# Altium PCB DA1.PcbDoc
Units mm, origin at the board's own origin, x right, y up, seen from the top; angles counter-clockwise.
Board outline 95.89 x 64.26 mm, 2 copper layers (Top Layer, Bottom Layer); 64 components, 73 nets, 258 pads, 30 vias.
Unrouted connection lines stored in the file: 1.
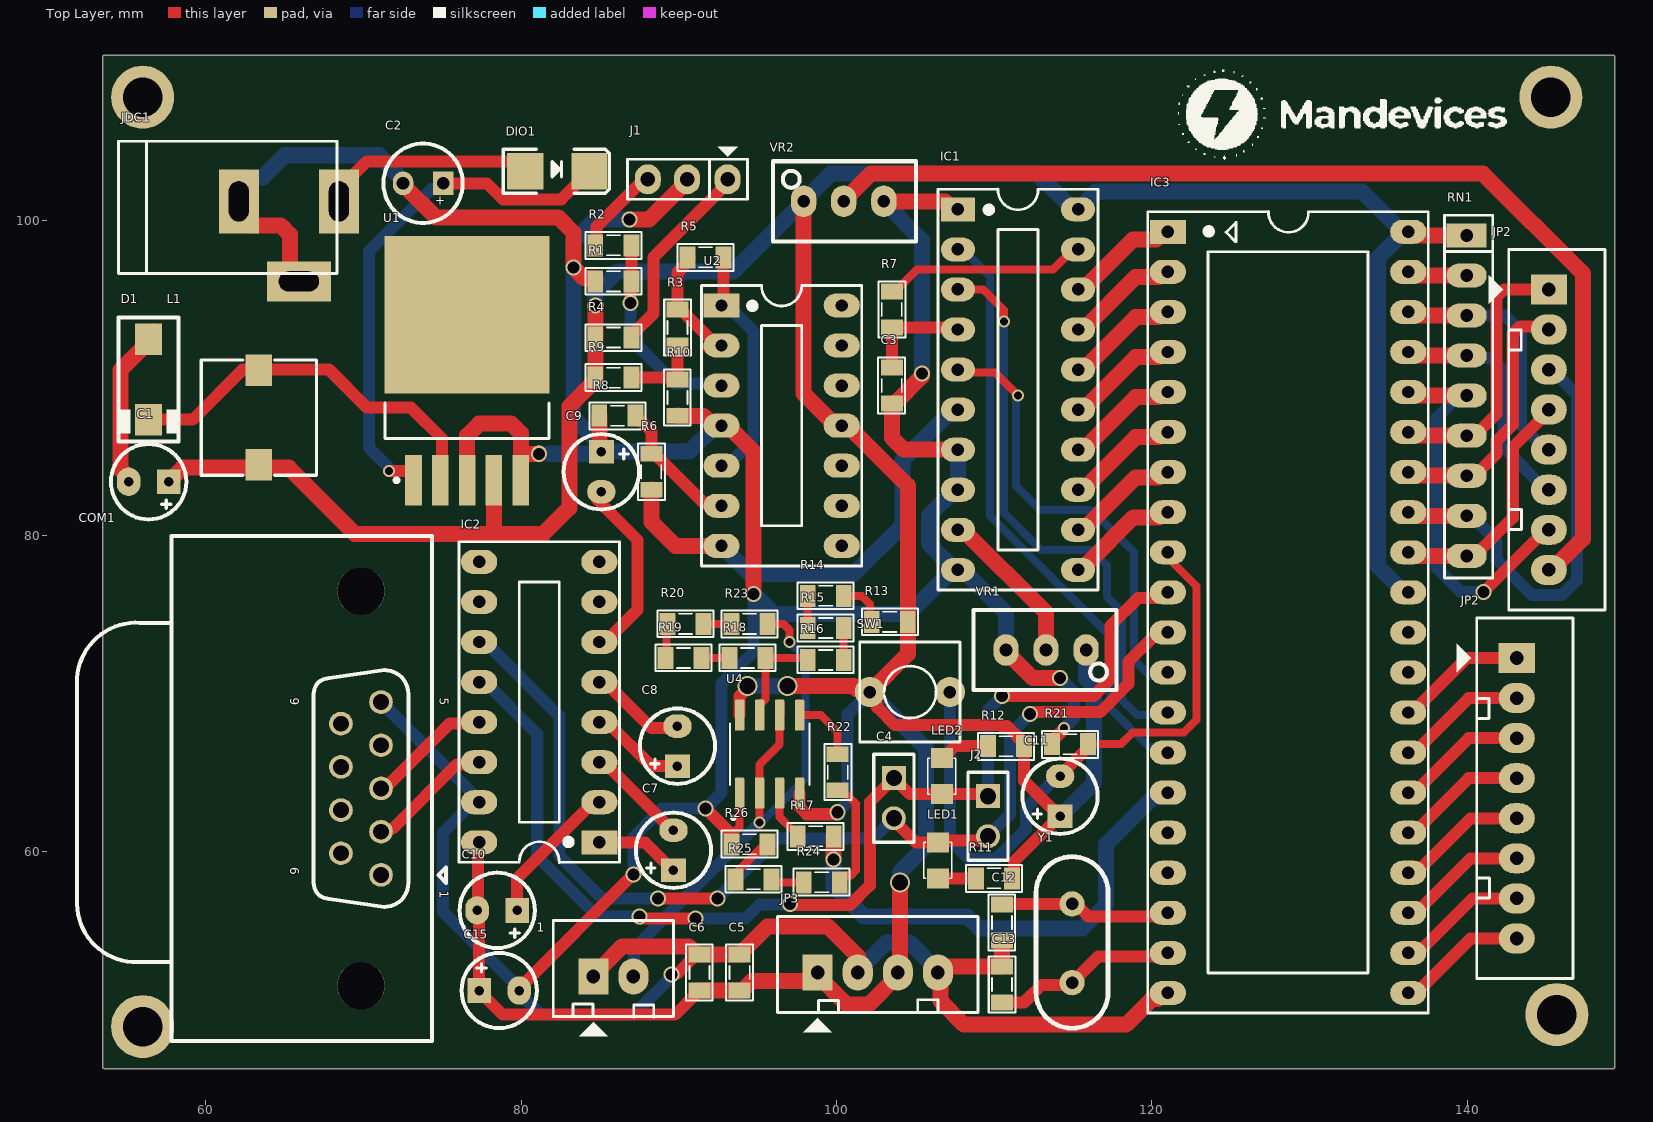
[diagram p0: Top Layer view]
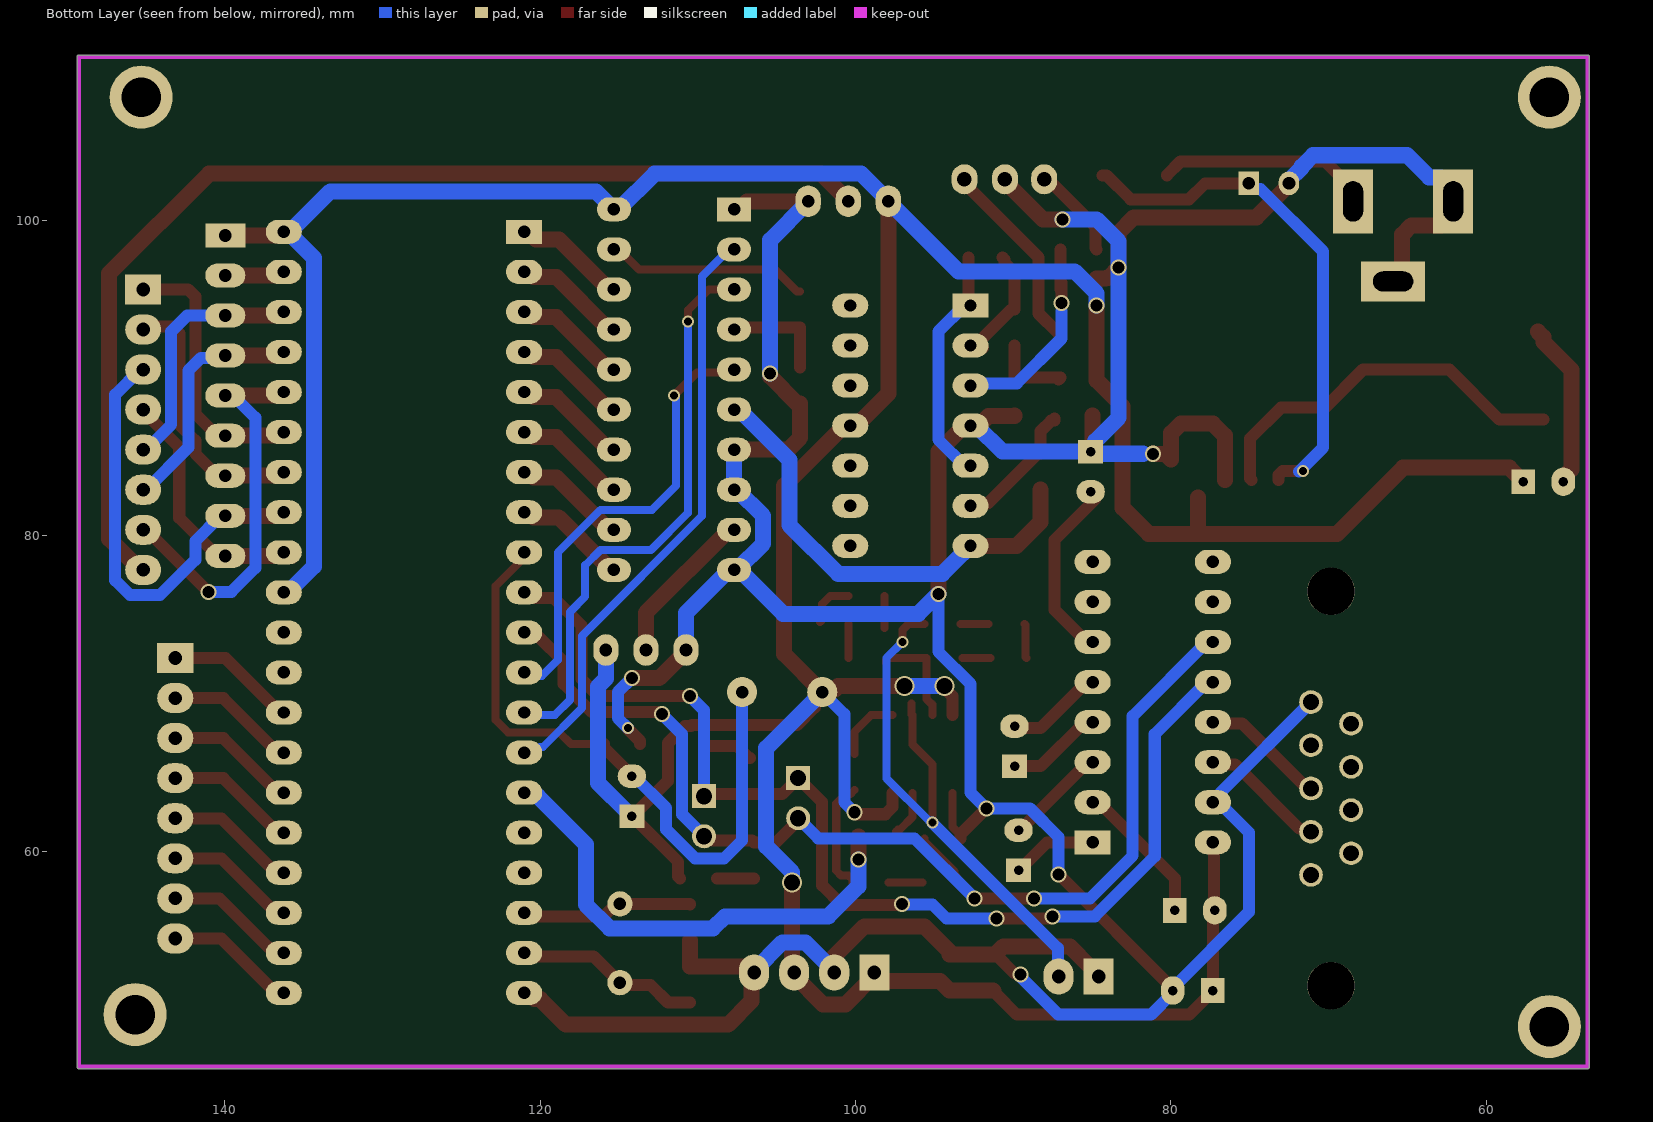
[diagram p1: Bottom Layer view, seen from below]
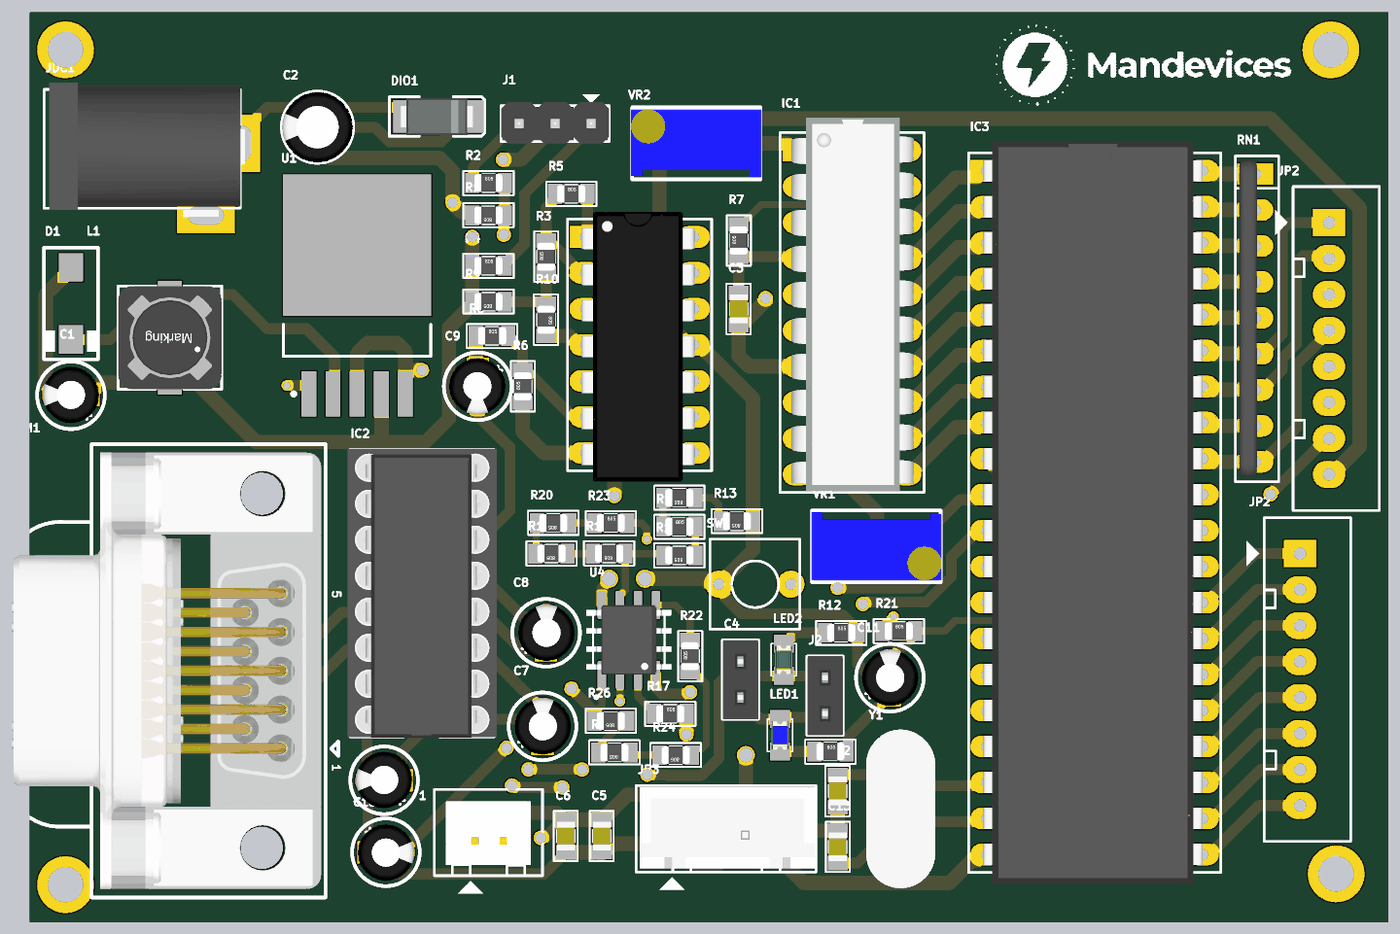
[diagram p2: 3D render of the assembled board from above, using the file's embedded part models]

## Layer stack, top to bottom
Top Solder: solder mask 0.0102, Solder Resist, Dk 3.5
Top Layer: signal copper 0.0356
Dielectric 1: dielectric 0.32, FR-4, Dk 4.8
Bottom Layer: signal copper 0.0356
Bottom Solder: solder mask 0.0102, Solder Resist, Dk 3.5

## Board outline
53.484,46.418 cw(c53.594,46.482) 53.467,46.482 53.467,110.363 cw(c53.594,110.363) 53.594,110.49 149.225,110.49 cw(c149.225,110.363) 149.352,110.363 cw(c149.225,110.363) 149.335,110.299 cw(c149.225,110.236) 149.352,110.236 149.352,46.355 cw(c149.225,46.355) 149.225,46.228 53.594,46.228 cw(c53.594,46.355)

## Design rules (kind name [scope] priority, off if disabled: settings)
Clearance [All] p1: gap=0.254 ignorepadtopadclearanceinfootprint=FALSE except(0: Arc-Hole Track-Hole SMDPad-Hole THPad-Hole Via-Hole Fill-Hole Poly-Hole Region-Hole Text-Hole)
PolygonConnect [All] p1: connectstyle=Relief reliefconductorwidth=0.254 reliefentries=4 polygonreliefangle="90 Angle" airgapwidth=0.254
RoutingVias [All] p1: holewidth=0.762 width=1.016 viastyle="Through Hole" minholewidth=0.508 minwidth=0.762 maxholewidth=1.016 maxwidth=1.27
SolderMaskExpansion [All] p1: expansion=0.102 istentingtop=FALSE
Width [All] p1: maxlimit=1.016 minlimit=0.508 preferedwidth=0.762
30 further rules are at their usual default settings.

## Components (designator, comment, footprint, x,y, rotation, side; value= is the part's Value field where it differs from the comment)
1 "HS1101" CON2 84.582,52.07 r0 top value="Connector 2"
C1 "220uF" C3MM 56.388,83.439 r180 top
C2 "680uF" C5mm 73.787,102.362 r180 top
C3 "150pF" CAP_0805 103.505,89.535 r270 top
C4 "JP2" JP2-C1T 103.632,64.643 r270 top
C5 "104" CAP_0805 93.853,52.324 r270 top value=33p
C6 "104" CAP_0805 91.313,52.324 r270 top value=33p
C7 "10uF/16V" C3MM 89.662,60.071 r90 top
C8 "10uF/16V" C3MM 89.916,66.675 r90 top
C9 "10uF/16V" C3MM 85.09,84.074 r270 top
C10 "10uF/16V" C3MM 78.486,56.261 r180 top
C11 "10uF" C3MM 114.173,63.5 r90 top
C12 "33p" CAP_0805 110.49,55.499 r270 top
C13 "33p" CAP_0805 110.49,51.562 r90 top
C15 "0.1uF" C3MM 78.613,51.181 r0 top
COM1 "COM 9 FMALE" COM9B 69.85,63.992 r270 top value="COM 9"
D1 "1N5822" SMA 56.388,89.92 r270 top value="Diode c?m 1N5408"
DIO1 "Diode SMD" DIO-SMD-106 82.296,103.124 r180 top value=1N5007
IC1 "ADC0804LCN" DIP20/W0.3 107.696,100.711 r270 top
IC2 "MAX232" DIP16/W0.3 84.963,60.579 r90 top
IC3 "AT89C52" DIP40/W0.6 121.007,99.288 r270 top
J1 "Jumper 3" JP3 90.551,102.616 r180 top value=J3
J2 "JP2" JP2-C1T 109.601,63.5 r270 top
JDC1 "Jac DC" DC-IN 65.278,98.679 r0 top
JP2 "" CON8 143.129,72.263 r270 top value="Connector 8"
JP2 "JP8" CON8 145.161,95.631 r270 top value="Connector 8"
JP3 "JP4" CON4 98.806,52.324 r0 top value="Connector 4"
L1 "33uH" L-SMD-M-7.3x4.5 63.373,87.503 r0 top value="150 mH"
LED1 "LED" LED-0805-Blue 106.426,58.293 r90 top value="LED 3 ly Single Colour"
LED2 "LED" LED-0805-Green 106.68,65.913 r270 top value="LED 3 ly Single Colour"
R1 "50k" RES-SMD-0805 85.852,96.139 r180 top
R2 "50k" RES-SMD-0805 85.852,98.425 r0 top
R3 "50k" RES-SMD-0805 89.916,93.218 r90 top
R4 "100" RES-SMD-0805 85.852,92.583 r0 top
R5 "50k" RES-SMD-0805 91.694,97.663 r0 top
R6 "7.5k" RES-SMD-0805 88.265,84.074 r90 top
R7 "10k" RES-SMD-0805 103.505,94.361 r90 top
R8 "1k" RES-SMD-0805 86.106,87.63 r0 top
R9 "100" RES-SMD-0805 85.852,90.043 r180 top
R10 "100" RES-SMD-0805 89.916,88.773 r270 top
R11 "390" RES-SMD-0805 109.982,58.293 r0 top
R12 "390" RES-SMD-0805 110.744,66.675 r0 top
R13 "24k" RES-SMD-0805 103.378,74.549 r180 top
R14 "10k" RES-SMD-0805 99.314,76.2 r180 top
R15 "6.8k" RES-SMD-0805 99.314,74.168 r0 top
R16 "9.1k" RES-SMD-0805 99.314,72.136 r180 top
R17 "1k" RES-SMD-0805 98.679,60.96 r0 top
R18 "270k" RES-SMD-0805 94.361,72.263 r180 top
R19 "270k" RES-SMD-0805 90.297,72.263 r180 top
R20 "36k" RES-SMD-0805 90.424,74.422 r180 top
R21 "10k" RES-SMD-0805 114.808,66.802 r0 top
R22 "360k" RES-SMD-0805 100.076,65.024 r90 top
R23 "20k" RES-SMD-0805 94.488,74.422 r0 top
R24 "360k" RES-SMD-0805 99.06,58.039 r180 top
R25 "150k" RES-SMD-0805 94.739,58.225 r180 top
R26 "39k" RES-SMD-0805 94.488,60.452 r180 top
RN1 "10K" RN8 139.954,99.06 r270 top value="Tro thanh 10K"
SW1 "SW" SW2 107.188,70.104 r180 top value="SW chip 2 pin"
U1 "LM2976" TO-263 76.581,89.535 r90 top
U2 "LF347" DIP14/W0.3 92.71,94.615 r270 top
U4 "TLC555IDR" SOIC127P599X175-8N 95.758,66.167 r90 top
VR1 "10k" VAR_RESISTOR 113.284,72.771 r180 top value="VR 10K"
VR2 "10K" VAR_RESISTOR 100.457,101.219 r0 top value="VR 10K"
Y1 "12Mhz" XTAL 114.935,54.229 r90 top

## Footprints (in the part's own frame and the unit in brackets; to place one, negate y for a bottom-side part, rotate by r counter-clockwise, add the part's x,y. Pads: shape width x height; smd on the part's side, far side on the other; paste and mask are expansions set on the pad)
C3MM [mm]
  rect 1.5x1.58 hole 0.6: 1(-1.27,0)
  oval 1.5x1.8 hole 0.6: 2(1.27,0)
  silkscreen extent -2.39,-2.39 2.39,2.39, body extent -2,-2.03 1.99,1.97, height 7.01
C5mm [mm]
  rect 1.3x1.5 hole 0.8: 1(-1.27,0)
  oval 1.3x1.5 hole 0.8: 2(1.27,0)
  silkscreen extent -2.51,-2.51 2.51,2.51, body extent -2.5,-2.5 2.49,2.5, height 11.01
CAP_0805 [mil]
  rect 39.37x55 smd: 1(-45,0) 2(45,0)
  silkscreen extent -70,-34 70,33, body extent -40,-25 40,25, height 24
COM9B [mm] "D-SUB- 9P, FEMALE, RT ANGLE, TH"
  round 1.5 hole 1 unplated: 1(5.48,1.27) 2(2.74,1.27) 3(0,1.27) 4(-2.74,1.27) 5(-5.48,1.27) 6(4.11,-1.27) 7(1.37,-1.27) 8(-1.37,-1.27) 9(-4.11,-1.27)
  round 3 hole 3 unplated: 10(-12.5,0) 11(12.5,0)
  silkscreen extent -16,-18.01 16,5.4, body extent -15.4,-17.65 15.4,4.2, height 13.2
CON2 [mil] "CON2"
  rect 75x90 hole 34: 1(0,0)
  oval 75x90 hole 34: 2(100,0)
  silkscreen extent -100,-150 200,140, body extent -68,-70 168,107, height 236
CON4 [mil] "CON4"
  rect 75x90 hole 34: 1(0,0)
  oval 75x90 hole 34: 2(100,0) 3(200,0) 4(300,0)
  silkscreen extent -100,-150 400,140, body extent -90,-90 398,136, height 276
CON8 [mil] "CON8"
  rect 75x90 hole 34: 1(0,0)
  oval 75x90 hole 34: 2(100,0) 3(200,0) 4(300,0) 5(400,0) 6(500,0) 7(600,0) 8(700,0)
  silkscreen extent -100,-150 800,140
DC-IN [mil] "Jac DC input"
  rect 100x160 hole 50 slot 100 at 90 deg: 1(125,100) 2(-125,100)
  rect 160x100 hole 50 slot 100 at 0 deg: 3(25,-100)
  silkscreen extent -425,-80 120,250, body extent -410,-105 134,269, height 434
DIO-SMD-106 [mil]
  rect 90x90.55 smd: 1(80,0) 2(-80,0)
  silkscreen extent -130,-55 135,55, body extent -99,-50 106,52, height 95
DIP14/W0.3 [mil] "14PIN, W 300mil, Pin to pin 100mil"
  rect 60x90 hole 31: 1(0,0)
  oval 60x90 hole 31: 2(100,0) 3(200,0) 4(300,0) 5(400,0) 6(500,0) 7(600,0) 8(600,300) 9(500,300) 10(400,300) 11(300,300) 12(200,300) 13(100,300) 14(0,300)
  silkscreen extent -50,-50 650,350, body extent -70,-12 680,302, height 145
DIP16/W0.3 [mil] "16 PIN, W 300mil, Pin to pin 100mil"
  rect 60x90 hole 31: 1(0,0)
  oval 60x90 hole 31: 2(100,0) 3(200,0) 4(300,0) 5(400,0) 6(500,0) 7(600,0) 8(700,0) 9(700,300) 10(600,300) 11(500,300) 12(400,300) 13(300,300) 14(200,300) 15(100,300) 16(0,300)
  silkscreen extent -50,-50 750,350, body extent -52,-57 752,356, height 299
DIP20/W0.3 [mil] "DIP 20, 20 PIN, W 300mil, Pin to pin 100mil"
  rect 60x85 hole 31: 1(0,0)
  oval 60x85 hole 31: 2(100,0) 3(200,0) 4(300,0) 5(400,0) 6(500,0) 7(600,0) 8(700,0) 9(800,0) 10(900,0) 11(900,300) 12(800,300) 13(700,300) 14(600,300) 15(500,300) 16(400,300) 17(300,300) 18(200,300) 19(100,300) 20(0,300)
  silkscreen extent -50,-50 950,350, body extent -91,-18 945,322, height 155
DIP40/W0.6 [mil] "40 PIN, W 600mil, Pin to pin 100mil"
  rect 60x90 hole 31: 1(0,0)
  oval 60x90 hole 31: 2(100,0) 3(200,0) 4(300,0) 5(400,0) 6(500,0) 7(600,0) 8(700,0) 9(800,0) 10(900,0) 11(1000,0) 12(1100,0) 13(1200,0) 14(1300,0) 15(1400,0) 16(1500,0) 17(1600,0) 18(1700,0) 19(1800,0) 20(1900,0) 21(1900,600) 22(1800,600) 23(1700,600) 24(1600,600) 25(1500,600) 26(1400,600) 27(1300,600) 28(1200,600) 29(1100,600) 30(1000,600) 31(900,600) 32(800,600) 33(700,600) 34(600,600) 35(500,600) 36(400,600) 37(300,600) 38(200,600) 39(100,600) 40(0,600)
  silkscreen extent -50,-50 1950,650, body extent -82,-10 1982,600, height 224
JP2-C1T [mm] "2 row, straight, gold plating"
  rect 1.52x1.52 hole 1.02: 1(0,0)
  round 1.52 hole 1.02: 2(2.54,0)
  silkscreen extent -1.52,-1.27 4.06,1.27, body extent -1.52,-1.25 4.06,1.25, height 8.51
JP3 [mil] "Jumper 3"
  oval 65x75 hole 36: 1(-100,0) 2(1,0) 3(99,0)
  silkscreen extent -150,-81 150,50, body extent -150,-60 150,55, height 355
L-SMD-M-7.3x4.5 [mm] "WE-PDA SMD Shielded Power Inductor, 7345"
  rect 1.7x2 smd: 1(0,3) 2(0,-3)
  silkscreen extent -3.65,-3.65 3.65,3.65, body extent -3.65,-3.65 3.65,3.65, height 4.05
LED-0805-Blue [mil]
  rect 50x55 smd: 1(0,0) 2(90,0)
  silkscreen extent 0,-35 90,35, body extent 5,-25 85,25, height 43
LED-0805-Green [mil]
  rect 50x55 smd: 1(0,0) 2(90,0)
  silkscreen extent 0,-35 90,35, body extent 5,-25 85,25, height 43
RES-SMD-0805 [mil]
  rect 39.37x55 smd: 1(-45,0) 2(45,0)
  silkscreen extent -70,-34 70,33, body extent -39,-25 39,25, height 31
RN8 [mil] "R SIP8, 9 Pin"
  rect 60x100 hole 32: 1(0,0)
  oval 60x100 hole 32: 2(100,0) 3(200,0) 4(300,0) 5(400,0) 6(500,0) 7(600,0) 8(700,0) 9(800,0)
  silkscreen extent -50,-55 855,65, body extent -43,-44 843,5, height 259
SMA [mm]
  rect 2x1.7 smd: 1(-2.544,0) 2(2.544,0)
  silkscreen extent -3.94,-1.9 3.94,1.91, body extent -2.87,-1.4 2.87,1.4, height 2.29
SOIC127P599X175-8N [mm]
  rrect25% 1.97x0.6 smd: 1(-2.47,1.905) 2(-2.47,0.635) 3(-2.47,-0.635) 4(-2.47,-1.905) 5(2.47,-1.905) 6(2.47,-0.635) 7(2.47,0.635) 8(2.47,1.905)
  silkscreen extent -4.14,-2.52 1.95,2.52, body extent -2.45,-3 2.45,3, height 1.75
SW2 [mil] "SW button 2pin, 250x 250 mil"
  round 75 hole 31: 1(0,0) 2(200,0)
  silkscreen extent -25,-125 225,125
TO-263 [mm]
  rect 3.2x1.05 smd: 1(-6,3.4) 2(-6,1.7) 3(-6,0) 4(-6,-1.7) 5(-6,-3.4)
  rect 10x10.45 smd: 6(4.5,0)
  silkscreen extent -6.12,-5.2 -1.1,5.2, body extent -6.58,-5.2 7.57,5.2, height 4.65
VAR_RESISTOR [mm]
  oval 1.6x2 hole 0.8: 1(-2.54,0) 2(0,0) 3(2.54,0)
  silkscreen extent -4.47,-2.54 4.6,2.54, body extent -4.54,-2.4 4.66,2.4, height 12.02
XTAL [mm]
  round 1.6 hole 0.8: 1(-2.552,0.001) 2(2.448,0.001)
  silkscreen extent -5.44,-2.29 5.44,2.29, body extent -5.55,-2.32 5.62,2.35, height 3.63

## Part data
1: library part Con2, "Connector 2"
C1 C2 C7 C8 C9 C10 C11 C15: library part "Cap Pol", "Polarized Capacitor (Axial)", LatestRevisionDate=17-Jul-2002, LatestRevisionNote="Re-released for DXP Platform.", PackageReference=POLAR0.8, Published=8-Jun-2000, Publisher="Altium Limited"
C3: library part "Tu 0805 220nF 50V 10%", "Dán", Chung_Loai=Dán, Don_Vi=Con, Ma_Hang=MH008099, So_Chan=2, Ten_Linh_Kien="Tụ 0805 220nF 50V 10%"
C4 J2: "WR-PHD 2.54 mm Angled Socket Header", Manufacturer="W¨¹rth Elektronik eiSos GmbH", partNo=613002143121, ComponentLink1 Description=Manufacturer, ComponentLink1URL=http://www.we-online.com, ComponentLink2 Description=Datasheet, ComponentLink2URL=http://katalog.we-online.de/em/datasheet/6130xx143121.pdf, Created by="Karrer Zheng", Created Date="29 March 2013", NoPins=02
C5 C6 C12 C13: library part CapSMD, "Capacitor", LatestRevisionDate=17-Jul-2002, LatestRevisionNote="Re-released for DXP Platform.", PackageReference=RAD-0.3, Published=8-Jun-2000, Publisher="Altium Limited"
COM1: library part COM9F, "COM 9", PackageDocument=O, DatasheetDocument=1-Sep-1999, Gender=Receptacle, LatestRevisionDate=17-Jul-2002, LatestRevisionNote="Re-released for DXP Platform.", Orientation="Right Angle", PackageReference=788750, Positions=9, Published=15-Jun-2001, Publisher="Altium Limited"
D1: "Schottky Rectifiers"
DIO1: "Default Diode", Code - JEDEC=DO-214-AB, Published=8-Jun-2000, Publisher="Altium Limited", Revision="July-2002: Re-released for DXP Platform."
IC1: library part ADC0804, "Cắm", Chung_Loai=Cắm, Don_Vi=Con, Ma_Hang=MH002626, Ten_Linh_Kien="ADC0804LCN DIP20"
IC2: "Dual EIA-232 Driver/Receiver"
IC3: "Atmel AT89C52, 8k Byte Flash Memory , 40 Pin"
J1: library part JP3
JDC1: library part DCIN, "Jac DC input"
JP2 JP2: library part Con8, "Connector 8"
JP3: library part Con4, "Connector 4"
L1: library part Inductor, "Inductor"
LED1 LED2: "LED Single colour Green and Red"
R1 R2 R3 R4 R5 R6 R8 R9 R10: library part "Tro 0805 5% 82k", "Dán", Chung_Loai=Dán, Don_Vi=Con, Ma_Hang=MH005329, So_Chan=2, Ten_Linh_Kien="Trở 0805 5% 82k"
R7: library part "Tro 0805 5% 10k", "Dán", Chung_Loai=Dán, Don_Vi=Con, Ma_Hang=MH005239, So_Chan=2, Ten_Linh_Kien="Trở 0805 5% 10k"
R11 R12: library part "Resistor - SMD", "Resistor", Manufacturer="Generic Components", Class=Passive, Published=08/06/2000, Publisher="Altium Hobart Technology Centre"
R13 R14 R15 R16 R18 R19 R21 R23 R24 R25 R26: library part "Resistor - SMD", "Resistor SMD", Manufacturer="Generic Components", Class=Passive, Published=08/06/2000, Publisher="Altium Hobart Technology Centre"
R17: library part "Tro 0805 1% 1k", "Dán", Chung_Loai=Dán, Don_Vi=Con, Ma_Hang=MH005468, So_Chan=2, Ten_Linh_Kien="Trở 0805 1% 1k"
R20: library part "Tro 0805 5% 510k", "Dán", Chung_Loai=Dán, Don_Vi=Con, Ma_Hang=MH007566, So_Chan=2, Ten_Linh_Kien="Trở 0805 5% 510k"
R22: library part "Tro 0805 5% 1M", "Dán", Chung_Loai=Dán, Don_Vi=Con, Ma_Hang=MH005235, So_Chan=2, Ten_Linh_Kien="Trở 0805 5% 1M"
RN1: library part RN8, "Resistor 8 (Thanh)"
SW1: library part SW2, "Switch button 2 pin"
U1: library part LM2596, Max Input Voltage="12 V", Max Output Current="3 (6.0 peak) A", Max Output Voltage=mV, Temperature Range="-40 to +125 degC", Category=IC-Power, Min Input Voltage=mV, Min Output Voltage=mV, Mounting Technology="Surface Mount", Status=Unreleased, Supply Voltage=mV
U2: "Low Power Quad Operational Amplifier", Current - Input Bias=50pA, Current - Output / Channel=-, Current - Supply=8mA, Manufacturer="Texas Instruments", Manufacturer Part Number=LF347BD, Operating Temperature="0°C ~ 70°C", Package / Case="14-SOIC (3.9mm Width), 14-SOL", Supplier Part Number=296-7136-5-ND, Voltage - Input Offset=3000µV, Voltage - Supply, Single/Dual (±)="7 V ~ 36 V, ±3.5 V ~ 18 V", Amplifier Type=J-FET, Category="Integrated Circuits (ICs)", Gain Bandwidth Product=3MHz, Number of Circuits=4, Output Type=-, Packaging=Tube, RoHS="RoHS Compliant", Slew Rate="13 V/µs", Supplier=Digi-Key, Supplier 1=Digi-Key, Supplier Part Number 1=296-7136-5-ND, Text Field1=pristel=Nsc\nsanopea\<parttype>.ckt
U4: "2.1-MHz, 250-A, Low-Power Timer 8-SOIC -40 to 85", Package="SOIC-8 Texas Instruments", Availability=Good, MF="Texas Instruments", MP=TLC555IDR, Price=None, Purchase-URL=https://pricing.snapeda.com/search/part/TLC555IDR/?ref=eda, SnapEDA_Link=https://www.snapeda.com/parts/TLC555IDR/Texas%20Instruments/view-part/46238/?ref=snap
VR1 VR2: library part VR, "Var Resistor"
Y1: library part XTAL, "Crystal Oscillator", LatestRevisionDate=17-Jul-2002, LatestRevisionNote="Re-released for DXP Platform.", PackageReference=R38, Published=8-Jun-2000, Publisher="Altium Limited"

## Free pads (board coordinates)
  round 4 hole 2.5: 1(56.007,48.895) 1(56.007,107.823) 1(145.288,107.823) 1(145.669,49.657)

## Via types
v1: diameter 1.016, hole 0.762, Top Layer to Bottom Layer, 21 vias
v2: diameter 0.762, hole 0.508, Top Layer to Bottom Layer, 6 vias
v3: diameter 1.27, hole 1.016, Top Layer to Bottom Layer, 3 vias

## Nets (pads, with @x,y where several pads share a name; then routed paths per layer and width w, separated by ;. In a path a pad name is that pad's centre, name@x,y a point inside that pad or via, vN(x,y) a via of type N, cw(c..) or ccw(c..) an arc to the next point about the centre after c; other vN are vias at no path point)
ADC0: IC1.18 IC3.1 | length 6.6
  Top Layer w1.016: IC1.18 115.633,95.631 118.808,98.806 120.269,98.806 IC3.1@120.523,99.06
ADC1: IC1.17 IC3.2 | length 6.6
  Top Layer w1.016: IC1.17 115.633,93.091 118.965,96.423 120.426,96.423 IC3.2@120.523,96.52
ADC2: IC1.16 IC3.3 | length 6.6
  Top Layer w1.016: IC1.16 115.633,90.551 118.965,93.883 120.426,93.883 IC3.3@120.523,93.98
ADC3: IC1.15 IC3.4 | length 6.6
  Top Layer w1.016: IC1.15 115.633,88.011 118.965,91.343 120.426,91.343 IC3.4@120.523,91.44
ADC4: IC1.14 IC3.5 | length 6.6
  Top Layer w1.016: IC1.14 115.633,85.471 118.965,88.803 120.426,88.803 IC3.5@120.523,88.9
ADC5: IC1.13 IC3.6 | length 6.6
  Top Layer w1.016: IC1.13 115.633,82.931 118.965,86.263 120.426,86.263 IC3.6@120.523,86.36
ADC6: IC1.12 IC3.7 | length 6.6
  Top Layer w1.016: IC1.12 115.633,80.391 118.965,83.723 120.426,83.723 IC3.7@120.523,83.82
ADC7: IC1.11 IC3.8 | length 6.6
  Top Layer w1.016: IC1.11 115.496,77.851 115.887,78.242 118.828,81.183 120.426,81.183 IC3.8@120.523,81.28
ENABLE: IC3.36 JP2.7@145.161,80.391 RN1.5 | length 25.6
  Top Layer w0.762: v1(141.034,76.454) 144.97,80.391 JP2.7@145.161,80.391
  Top Layer w1.016: IC3.36@135.763,88.9 RN1.5
  Bottom Layer w0.762: RN1.5 139.446,88.9 138.049,87.503 138.049,77.978 139.573,76.454 v1(141.034,76.454)
GND: 1.1 C1.2 C2.2 C3.2 C5.1 C6.1 C9.1 C12.2 C13.2 C15.2 COM1.5 D1.1 IC1.1 IC1.7 IC1.8 IC1.10 IC2.15 IC3.20 J1.2 JDC1.2 JDC1.3 JP3.2 JP3.4 R1.2 R8.1 R10.2 R21.1 R26.2 U1.3 U1.5 U2.4 U4.1 VR1.3 VR2.3 | length 303.6
  Top Layer w0.508: R26.2@93.345,61.031 93.853,61.539 U4.1
  Top Layer w0.762: C15.2 79.883,51.308 v1(87.122,58.547) ; v1(89.535,52.197) 89.584,52.246 89.893,52.246 91.115,53.467 91.13,53.467 C6.1 ; v1(91.706,62.726) 93.345,61.087 93.345,61.031 R26.2@93.345,60.833 ; R21.1 113.665,67 114.427,67.763 v2(114.427,67.818)
  Top Layer w1.016: C1.2@55.342,83.196 55.342,83.496 54.61,84.228 54.61,90.536 56.388,92.314 56.388,92.614 D1.1@56.73,92.956 ; JDC1.2 62.103,100.457 62.865,99.695 64.748,99.695 65.343,99.1 JDC1.3@65.343,96.266 ; JDC1.3@65.343,96.139 JDC1.3 ; C2.2 72.61,102.269 72.61,102.169 74.583,100.196 82.358,100.196 83.312,99.242 v1(83.312,97.028) 83.989,96.351 84.114,96.351 84.136,96.33 84.701,96.33 84.709,96.322 R1.2 ; U1.3 76.581,86.36 77.343,87.122 79.375,87.122 79.981,86.516 ; v1(81.149,85.213) 81.145,85.209 80.354,85.209 79.981,84.836 79.981,86.516 ; 1.1 84.582,52.261 85.026,52.705 85.142,52.705 86.412,53.975 90.623,53.975 C6.1@91.13,53.467 ; R8.1 84.963,85.471 C9.1 ; v1(86.868,100.076) 88.113,100.076 90.526,102.489 J1.2 ; R10.2 89.924,87.622 91.565,87.622 92.192,86.995 U2.4 93.091,86.995 94.742,85.344 v1(94.742,76.327) ; C6.1 91.694,53.467 C5.1 94.036,53.467 94.043,53.475 94.043,53.657 95.631,55.245 99.441,55.245 101.346,53.34 JP3.2 ; VR2.3 106.87,101.219 107.379,100.711 IC1.1 ; v1(105.41,90.297) 105.41,90.114 103.688,88.392 C3.2 103.505,86.233 104.267,85.471 IC1.7 ; JP3.4@106.426,52.705 JP3.4 106.596,52.154 106.596,50.503 108.077,49.022 118.364,49.022 119.976,50.634 120.357,50.634 IC3.20@120.523,50.8 ; JP3.4@106.857,52.705 C13.2 C12.2 ; VR1.3 110.744,72.702 112.453,70.993 v1(114.173,70.993) ; 79.981,86.516 79.981,85.209 79.981,86.516
  Bottom Layer w0.762: COM1.5 76.816,63.775 76.816,63.471 IC2.15@77.168,63.119 ; IC2.15 IC2.15@77.168,63.119 ; v1(87.122,58.547) 87.122,60.91 88.938,62.726 v1(91.706,62.726) 92.71,63.73 92.71,70.63 94.742,72.662 v1(94.742,76.327) ; v1(89.535,52.197) 89.535,52.047 87.145,49.657 81.257,49.657 79.883,51.031 C15.2 79.883,51.331 75.057,56.157 75.057,61.214 76.962,63.119 IC2.15@77.168,63.119 ; v1(114.173,70.993) 115.062,70.104 115.062,68.453 v2(114.427,67.818)
  Bottom Layer w1.016: JDC1.2 62.103,101.981 62.865,102.743 63.627,102.743 65.024,104.14 70.993,104.14 71.711,103.422 71.711,103.344 72.517,102.539 C2.2 ; 81.784,85.213 84.959,85.213 C9.1 90.678,85.344 92.329,86.995 U2.4 ; C9.1@84.808,86.007 83.312,87.503 83.312,98.679 84.709,100.076 v1(86.868,100.076) ; v1(94.742,76.327) 96.012,75.057 104.584,75.057 107.379,77.851 IC1.10@107.516,77.851 ; JP3.2 101.346,52.399 103.176,54.229 104.638,54.229 106.426,52.441 JP3.4 ; VR2.3 102.997,101.177 105.41,98.764 v1(105.41,90.297) ; IC1.7 IC1.8 107.516,82.931 105.855,81.27 105.855,79.512 IC1.10@107.516,77.851 ; VR1.3 110.744,75.12 108.013,77.851 IC1.10 IC1.10@107.516,77.851
HS1101_COUNTER: IC3.15 R17.2 | length 30.7
  Top Layer w1.016: v1(99.822,59.499) R17.2
  Bottom Layer w1.016: v1(99.822,59.499) 99.822,57.785 101.727,55.88 108.272,55.88 109.037,55.115 115.581,55.115 117.094,56.628 117.094,60.452 120.142,63.5 IC3.15@120.523,63.5
INTR_ADC: IC1.5 IC3.12 | length 28.4
  Top Layer w0.508: IC1.5 107.886,90.361 110.046,90.361 v2(111.506,88.9)
  Bottom Layer w0.508: v2(111.506,88.9) 111.379,88.773 111.379,83.185 112.903,81.661 116.16,81.661 118.872,78.949 118.872,72.136 119.888,71.12 IC3.12@120.523,71.12
Net1_2: 1.2 R23.2 U4.2 U4.6 | length 36.3
  Top Layer w0.508: v2@95.123,62.103 U4.2 95.123,65.509 96.393,66.779 U4.6 96.439,68.683 U4.6@96.439,69.368 ; R23.2 96.647,74.422 97.028,74.041 v2(97.028,73.279)
  Bottom Layer w0.508: v2(95.123,61.849) 95.192,61.849 95.319,61.976 95.377,61.976 98.031,64.63 98.031,72.276 v2(97.028,73.279)
  Bottom Layer w0.762: 1.2 87.175,52.123 87.175,53.866 95.123,61.814 v2(95.123,61.849)
NetC2_1: C2.1 DIO1.2 U1.1 | length 33.5
  Top Layer w0.762: v2(71.628,84.129) 72.91,84.129 73.181,83.858 U1.1 ; C2.1 77.835,102.362 78.858,101.339 82.55,101.339 84.081,102.87 DIO1.2@84.328,102.87
  Bottom Layer w0.762: v2@71.882,84.074 70.358,85.598 70.358,98.044 74.307,101.993 74.788,101.993 75.057,102.262 C2.1
NetC3_1: C3.1 IC1.4 R7.1 | length 6.8
  Top Layer w0.762: C3.1 R7.1 107.569,93.218 IC1.4
NetC7_1: C7.1 IC2.1 | length 5.4
  Top Layer w0.762: IC2.1 87.844,60.579 89.622,58.801 C7.1
NetC7_2: C7.2 IC2.3 | length 6.5
  Top Layer w0.762: IC2.3 85.269,65.659 89.587,61.341 C7.2
NetC8_1: C8.1 IC2.4 | length 6.1
  Top Layer w0.762: IC2.4 85.471,68.199 88.265,65.405 C8.1
NetC8_2: C8.2 IC2.5 | length 6.2
  Top Layer w0.762: IC2.5 85.344,70.739 88.265,67.818 89.789,67.818 C8.2
NetC9_2: C9.2 IC2.6 | length 11.3
  Top Layer w0.762: C9.2@84.809,82.323 87.376,79.756 87.376,75.311 85.344,73.279 IC2.6
NetC10_1: C10.1 IC2.2 | length 9.2
  Top Layer w0.762: C10.1 79.756,58.293 84.582,63.119 IC2.2
NetCOM1_2: COM1.2 IC2.14 | length 7.2
  Top Layer w0.762: 71.857,61.443 75.932,65.518 77.202,65.518 IC2.14
NetCOM1_3: COM1.3 IC2.13 | length 7.3
  Top Layer w0.762: COM1.3@71.654,64.288 75.492,68.126 IC2.13@77.27,68.126
  Top Layer w1.016: IC2.13@77.27,68.126 IC2.13
NetD1_2: D1.2 L1.1 U1.2 | length 24.4
  Top Layer w0.762: D1.2 59.178,87.376 62.353,90.551 63.373,90.551 64.516,90.551 65.405,90.551 67.818,90.551 70.231,88.138 73.025,88.138 74.996,86.167 74.996,83.65 U1.2
NetDIO1_1: DIO1.1 JDC1.1 | length 13.7
  Top Layer w0.762: JDC1.1 68.453,101.981 70.219,103.747 79.394,103.747 80.264,102.877 DIO1.1@80.264,102.87
NetIC1_19: IC1.19 R7.2 | length 12.9
  Top Layer w0.508: R7.2 103.703,95.504 105.101,96.901 113.728,96.901 114.998,98.171 IC1.19
NetIC3_39: IC3.39 RN1.2 | length 4.2
  Top Layer w1.016: IC3.39@135.763,96.52 RN1.2
NetJ1_1: J1.1 R4.2 | length 12.6
  Top Layer w0.762: R4.2 86.995,92.781 87.114,92.9 87.185,92.9 88.392,94.107 88.392,97.663 93.091,102.362 J1.1
NetJ1_3: J1.3 R2.1 | length 6
  Top Layer w0.762: R2.1@84.709,98.171 84.796,98.258 84.796,99.62 87.792,102.616 J1.3
NetLED1_1: LED1.1 R11.1 | length 2.4
  Top Layer w0.762: LED1.1 106.43,58.289 R11.1@108.78,58.289
NetLED2_1: LED2.1 R12.1 | length 3.2
  Top Layer w0.762: LED2.1 106.743,65.913 107.505,66.675 R12.1
NetR1_1: R1.1 R2.2 U2.3 | length 12.7
  Top Layer w0.762: v1(86.934,94.773) 86.934,96.078 R1.1 ; R1.1@86.995,95.631 R2.2@86.995,98.171
  Bottom Layer w0.762: 86.934,94.265 86.934,92.517 89.77,89.681 92.564,89.681 U2.3
NetR3_1: R3.1 R9.1 R10.1 | length 5.3
  Top Layer w0.762: R9.1@87.114,89.924 R9.1 88.638,90.043 88.646,90.035 89.797,90.035 R10.1 R3.1
NetR3_2: R3.2 R5.1 U2.2 | length 8.2
  Top Layer w0.762: R5.1@90.678,97.663 90.559,97.544 90.559,97.346 89.916,96.703 R3.2 90.114,94.361 92.4,92.075 U2.2 92.564,91.929 U2.2@91.929,91.929
NetR5_2: R5.2 U2.1 U2.5 | length 15.4
  Top Layer w0.762: U2.1 92.837,94.742 R5.2
  Bottom Layer w0.762: U2.5 93.091,84.455 94.742,86.106 94.742,92.964 93.091,94.615 U2.1
NetR6_2: R6.2 R8.2 U2.6 | length 8.6
  Top Layer w0.762: R8.2@87.368,87.454 87.368,87.312 87.593,87.312 88.265,86.641 R6.2 88.463,85.217 91.62,82.061 92.564,82.061 U2.6
NetR13_2: R13.2 R14.1 | length 3.1
  Top Layer w0.508: R14.1 101.6,76.2 102.108,75.692 102.108,74.676 R13.2
NetR14_2: R14.2 R15.1 | length 2
  Top Layer w0.508: R15.1 R14.2
NetR15_2: R15.2 R16.1 | length 2.2
  Top Layer w0.508: R16.1@100.457,72.263 R15.2@100.457,74.422
NetR16_2: R16.2 R18.1 U4.7 | length 6.6
  Top Layer w0.508: U4.7 95.123,69.322 95.169,69.368 95.206,69.368 95.504,69.666 R18.1 97.925,72.263 98.052,72.136 R16.2@98.052,71.945
NetR17_1: R17.1 U4.3 | length 3
  Top Layer w0.508: U4.3 96.393,62.174 97.163,61.404 97.29,61.404 97.417,61.277 R17.1@97.417,61.151
NetR18_2: R18.2 R19.1 | length 1.8
  Top Layer w0.508: R19.1 R18.2
NetR19_2: R19.2 R20.2 | length 2.2
  Top Layer w0.508: R19.2 89.218,72.326 89.218,74.358 R20.2
NetR20_1: R20.1 R23.1 | length 1.8
  Top Layer w0.508: R20.1 R23.1
NetR22_1: R22.1 R24.1 | length 7.2
  Top Layer w0.508: R22.1 100.322,63.635 100.616,63.635 101.219,63.032 101.219,58.781 100.921,58.483 100.449,58.483 100.203,58.237 R24.1
NetR22_2: R22.2 U4.5 | length 4.3
  Top Layer w0.508: U4.5 99.016,68.637 100.076,67.577 R22.2
NetR24_2: R24.2 R25.1 | length 2.2
  Top Layer w0.508: R25.1@95.758,58.039 R24.2
NetR25_2: R25.2 R26.1 | length 4.1
  Top Layer w0.508: R25.2@93.472,58.039 93.718,58.285 93.718,58.722 95.412,60.415 95.631,60.635 R26.1@95.631,60.833 ; R25.2 R25.2@93.596,58.424 ; R26.1@95.503,60.324 R26.1
P0_4: IC3.35 JP2.1@145.161,95.631 RN1.6 | length 17.6
  Top Layer w0.762: RN1.6 140.462,86.36 141.859,87.757 141.859,95.185 142.305,95.631 JP2.1@145.161,95.631
  Top Layer w1.016: IC3.35@135.763,86.36 RN1.6
P0_5: IC3.34 JP2.2@145.161,93.091 RN1.7 | length 17.3
  Top Layer w0.762: RN1.7 140.462,83.82 141.859,85.217 141.859,86.041 142.875,87.057 142.875,92.837 143.321,93.283 144.969,93.283 JP2.2@145.161,93.091
  Top Layer w1.016: IC3.34@135.763,83.82 RN1.7
P0_6: IC3.33 JP2.3@145.161,90.551 RN1.8 | length 28.5
  Top Layer w1.016: IC3.33@135.763,81.28 RN1.8
  Bottom Layer w0.762: RN1.8 140.256,81.28 141.859,79.677 141.859,78.486 144.082,76.263 146.009,76.263 146.939,77.193 146.939,88.963 145.351,90.551 JP2.3@145.161,90.551
P0_7: IC3.32 JP2.4@145.161,88.011 RN1.9 | length 15.9
  Top Layer w0.762: RN1.9 140.462,78.74 142.875,81.153 142.875,85.621 145.161,87.907 JP2.4@145.161,88.011
  Top Layer w1.016: IC3.32@135.763,78.74 RN1.9
P2_0: IC3.21 JP2.8@143.129,54.483 | length 8.3
  Top Layer w0.762: IC3.21 136.753,51.028 140.208,54.483 JP2.8@143.129,54.483
P2_1: IC3.22 JP2.7@143.129,57.023 | length 8.3
  Top Layer w0.762: IC3.22 136.834,53.568 137.215,53.949 137.261,53.949 140.335,57.023 JP2.7@143.129,57.023
P2_2: IC3.23 JP2.6@143.129,59.563 | length 8.3
  Top Layer w0.762: IC3.23 136.753,56.108 140.208,59.563 JP2.6@143.129,59.563
P2_3: IC3.24 JP2.5@143.129,62.103 | length 8.3
  Top Layer w0.762: IC3.24 136.753,58.648 140.208,62.103 JP2.5@143.129,62.103
P2_4: IC3.25 JP2.4@143.129,64.643 | length 8.3
  Top Layer w0.762: IC3.25 136.626,61.188 140.081,64.643 JP2.4@143.129,64.643
P2_5: IC3.26 JP2.3@143.129,67.183 | length 8.3
  Top Layer w0.762: IC3.26 136.626,63.728 140.081,67.183 JP2.3@143.129,67.183
P2_6: IC3.27 JP2.2@143.129,69.723 | length 8.3
  Top Layer w0.762: IC3.27 136.626,66.268 140.081,69.723 JP2.2@143.129,69.723
P2_7: IC3.28 JP2.1@143.129,72.263 | length 8.3
  Top Layer w0.762: IC3.28 136.499,68.808 139.954,72.263 JP2.1@143.129,72.263
RD_ADC: IC1.2 IC3.14 | length 37.7
  Bottom Layer w0.508: IC1.2 108.013,98.171 109.728,96.456 109.728,81.28 117.348,73.66 117.348,69.088 119.827,66.609 120.009,66.609 IC3.14@120.523,66.095
RS_LCD: IC3.38 JP2.5@145.161,85.471 RN1.3 | length 16.4
  Top Layer w1.016: IC3.38@135.763,93.98 RN1.3
  Bottom Layer w0.762: RN1.3 142.367,93.98 143.383,92.964 143.383,87.058 144.97,85.471 JP2.5@145.161,85.471
RST: C11.2 IC3.9 R21.2 SW1.1 | length 41.3
  Top Layer w0.508: R21.2 118.042,66.802 118.778,67.538 122.021,67.538 122.809,68.326 122.809,76.835 IC3.9@120.904,78.74
  Top Layer w0.762: C11.2 114.464,65.061 114.464,65.117 115.951,66.604 R21.2
  Bottom Layer w0.762: SW1.1 107.188,60.706 108.329,59.565 110.179,59.565 112.012,61.398 112.012,62.759 114.023,64.77 C11.2
RW_LCD: IC3.37 JP2.6@145.161,82.931 RN1.4 | length 15.8
  Top Layer w1.016: IC3.37@135.763,91.44 RN1.4
  Bottom Layer w0.762: RN1.4 140.095,91.299 141.492,91.299 142.285,90.506 142.285,85.617 144.97,82.931 JP2.6@145.161,82.931
RXD: C4.1 IC2.12 IC3.10 J2.1 LED2.2 | length 71.2
  Top Layer w0.762: v1(87.503,55.887) 87.637,55.753 v1(91.059,55.753) ; v1(97.061,56.667) 97.11,56.618 98.524,56.618 98.552,56.591 100.851,56.591 102.108,57.847 102.108,63.119 C4.1 104.648,63.627 LED2.2 J2.1@109.22,63.627 ; v1(110.49,69.85) 116.292,69.85 117.386,70.944 117.386,74.333 119.112,76.059 120.382,76.059 IC3.10@120.523,76.2
  Bottom Layer w0.762: IC2.12 77.724,70.739 81.026,67.437 81.026,59.69 84.829,55.887 v1(87.503,55.887) ; v1(91.059,55.753) 94.234,55.753 95.123,56.642 97.036,56.642 v1(97.061,56.667) ; J2.1 109.601,68.961 v1(110.49,69.85)
TXD: C4.2 IC2.11 IC3.11 J2.2 LED1.2 | length 67.3
  Top Layer w0.762: v1(88.676,57.03) 92.449,57.03 v1(92.456,57.023) ; C4.2 103.632,61.976 105.029,60.579 LED1.2 106.553,60.706 109.142,60.706 109.601,61.165 J2.2@109.601,61.214 ; v1(112.268,68.707) 112.337,68.707 112.464,68.834 116.713,68.834 118.5,70.621 118.5,72.018 120.142,73.66 IC3.11@120.523,73.66
  Bottom Layer w0.762: IC2.11 77.724,73.279 82.423,68.58 82.423,59.73 85.122,57.03 v1(88.676,57.03) ; v1(92.456,57.023) 96.266,60.833 102.362,60.833 C4.2 ; J2.2 110.996,62.355 110.996,67.435 v1(112.268,68.707)
V_PT100: IC1.6 R6.1 U2.7 | length 29.7
  Top Layer w1.016: R6.1 88.265,80.899 89.789,79.375 U2.7
  Bottom Layer w1.016: U2.7 92.954,79.375 93.188,79.14 93.188,78.897 94.488,77.597 101.092,77.597 104.187,80.692 104.187,84.819 107.379,88.011 IC1.6
VCC: C1.1 C5.2 C6.2 C10.2 C11.1 C15.1 IC1.20 IC2.16 IC3.31 IC3.40 JP3.1 JP3.3 L1.2 R4.1 R9.2 R11.2 R12.2 R13.1 RN1.1 SW1.2 U1.4 U2.11 U4.4 U4.8 VR1.1 VR2.1 | length 282
  Top Layer w0.762: C15.1 77.343,51.141 78.838,49.646 89.77,49.646 91.123,50.998 91.123,51.189 91.242,51.308 C6.2@91.44,51.308 ; C15.1@77.343,51.308 77.343,56.134 C10.2 77.279,56.325 77.279,60.515 IC2.16 ; C6.2 C6.2@91.44,51.181 ; U4.8 93.853,69.84 94.361,70.348 v3(94.361,70.485) ; U4.4 97.663,62.803 98.109,62.357 99.949,62.357 v1(100.076,62.484) ; SW1.2@102.235,69.977 102.235,69.668 102.574,69.329 102.574,69.13 103.695,68.008 110.364,68.008 110.427,67.945 110.815,67.945 111.887,66.873 111.887,64.476 C11.1@114.133,62.23 ; R11.2 111.244,58.412 111.244,59.341 C11.1@114.133,62.23 ; C11.1 C11.1@114.133,62.23
  Top Layer w1.016: C1.1 57.658,83.479 57.9,83.721 57.94,83.721 58.547,84.328 63.373,84.328 65.278,84.328 69.469,80.137 78.298,80.137 ; U1.4@78.298,82.443 78.298,80.137 ; R9.2@84.709,89.86 83.058,88.209 83.058,81.788 81.407,80.137 78.74,80.137 78.298,80.137 ; R9.2 84.709,90.233 R4.1 v1(84.709,94.615) ; C6.2 C5.2 94.036,51.181 94.639,51.784 JP3.1@98.457,51.784 ; v3(96.888,70.485) 101.098,70.485 101.309,70.274 101.938,70.274 SW1.2 ; VR2.1 97.917,89.027 99.949,86.995 U2.11 100.711,86.995 104.521,83.185 R13.1 104.521,72.517 SW1.2 ; JP3.1 98.806,52.133 100.647,50.292 102.044,50.292 103.886,52.133 JP3.3 104.013,52.451 v3(104.013,58.039) ; SW1.2@102.235,69.977 SW1.2 ; VR1.1@115.824,72.413 VR1.1 ; IC3.40@135.763,99.06 RN1.1
  Bottom Layer w0.762: v1(100.076,62.484) 100.711,63.119 100.711,68.705 102.108,70.102 SW1.2
  Bottom Layer w1.016: v1(84.709,94.615) 84.709,95.377 86.106,96.774 93.472,96.774 97.605,100.907 97.647,100.907 97.917,101.177 VR2.1 97.917,101.261 99.637,102.981 112.728,102.981 114.998,100.711 IC1.20 116.459,101.854 133.299,101.854 135.866,99.288 IC3.40@136.003,99.288 ; v3(94.361,70.485) v3(96.888,70.485) ; JP3.1@98.679,51.816 98.806,51.943 JP3.1 ; SW1.2 105.664,66.548 105.664,60.325 104.013,58.674 v3(104.013,58.039) ; C11.1 114.415,62.472 114.455,62.472 116.332,64.349 116.332,70.45 115.824,70.958 VR1.1 ; IC3.31 135.979,76.428 134.342,78.065 134.342,97.626 IC3.40@136.003,99.288 ; IC3.40 IC3.40@136.003,99.288
VREF/2: IC1.9 VR1.2 | length 10.1
  Top Layer w1.016: IC1.9 108.013,80.391 113.284,75.12 VR1.2
VS_LCD: JP2.8@145.161,77.851 VR2.2 | length 70
  Top Layer w1.016: VR2.2 100.457,101.261 102.177,102.981 140.986,102.981 147.32,96.647 147.32,79.819 145.642,78.141 145.451,78.141 JP2.8@145.161,77.851
WR_ADC: IC1.3 IC3.13 | length 36
  Top Layer w0.508: IC1.3 109.303,95.631 110.617,94.317 v2(110.617,93.599)
  Bottom Layer w0.508: v2(110.617,93.599) 110.617,81.469 112.965,79.121 116.16,79.121 117.135,78.146 117.135,76.159 118.11,75.184 118.11,69.596 119.064,68.642 120.461,68.642 IC3.13@120.523,68.58
"XTAL 1": C12.1 IC3.18 Y1.2 | length 10.4
  Top Layer w0.762: C12.1 110.508,56.66 114.917,56.66 Y1.2 115.161,56.677 115.958,55.88 IC3.18@120.523,55.88
"XTAL 2": C13.1 IC3.19 Y1.1 | length 11.2
  Top Layer w0.762: C13.1 111.887,50.419 112.991,51.523 114.78,51.523 Y1.1 116.597,53.34 IC3.19@120.523,53.34
pads on no net: COM1.1 COM1.4 COM1.6 COM1.7 COM1.8 COM1.9 COM1.10 COM1.11 IC2.7 IC2.8 IC2.9 IC2.10 IC3.16 IC3.17 IC3.29 IC3.30 U1.6 U2.8 U2.9 U2.10 U2.12 U2.13 U2.14

## Keep-outs
Bottom Layer:
  lines w0.254: 53.594,46.355 149.225,46.355 149.225,110.236 ; 53.594,46.482 53.594,109.982 53.594,110.363 149.225,110.363

## Silkscreen, mask and mechanical layers (free items; w line width, h text height)
Top Overlay:
  drawing of 654 lines, arcs and shapes, not listed

## Text inside footprints (layer, text, board x,y; h text height)
C2: Top Overlay "+" at 75.184,101.524 h0.56 r180
COM1: Top Overlay "6" at 65.35,58.992 h0.56 r270; Top Overlay "9" at 65.35,69.742 h0.56 r270; Top Overlay "5" at 74.85,69.742 h0.56 r270; Top Overlay "1" at 74.85,57.492 h0.56 r270